# Altium PCB MainPCB.PcbDoc (part 4 of 4)
Units mm, origin at the board's own origin, x right, y up, seen from the top; angles counter-clockwise.
Board outline 219.96 x 164.97 mm, 2 copper layers (Top Layer, Bottom Layer); 298 components, 220 nets, 976 pads, 1045 vias.
Unrouted connection lines stored in the file: 1.
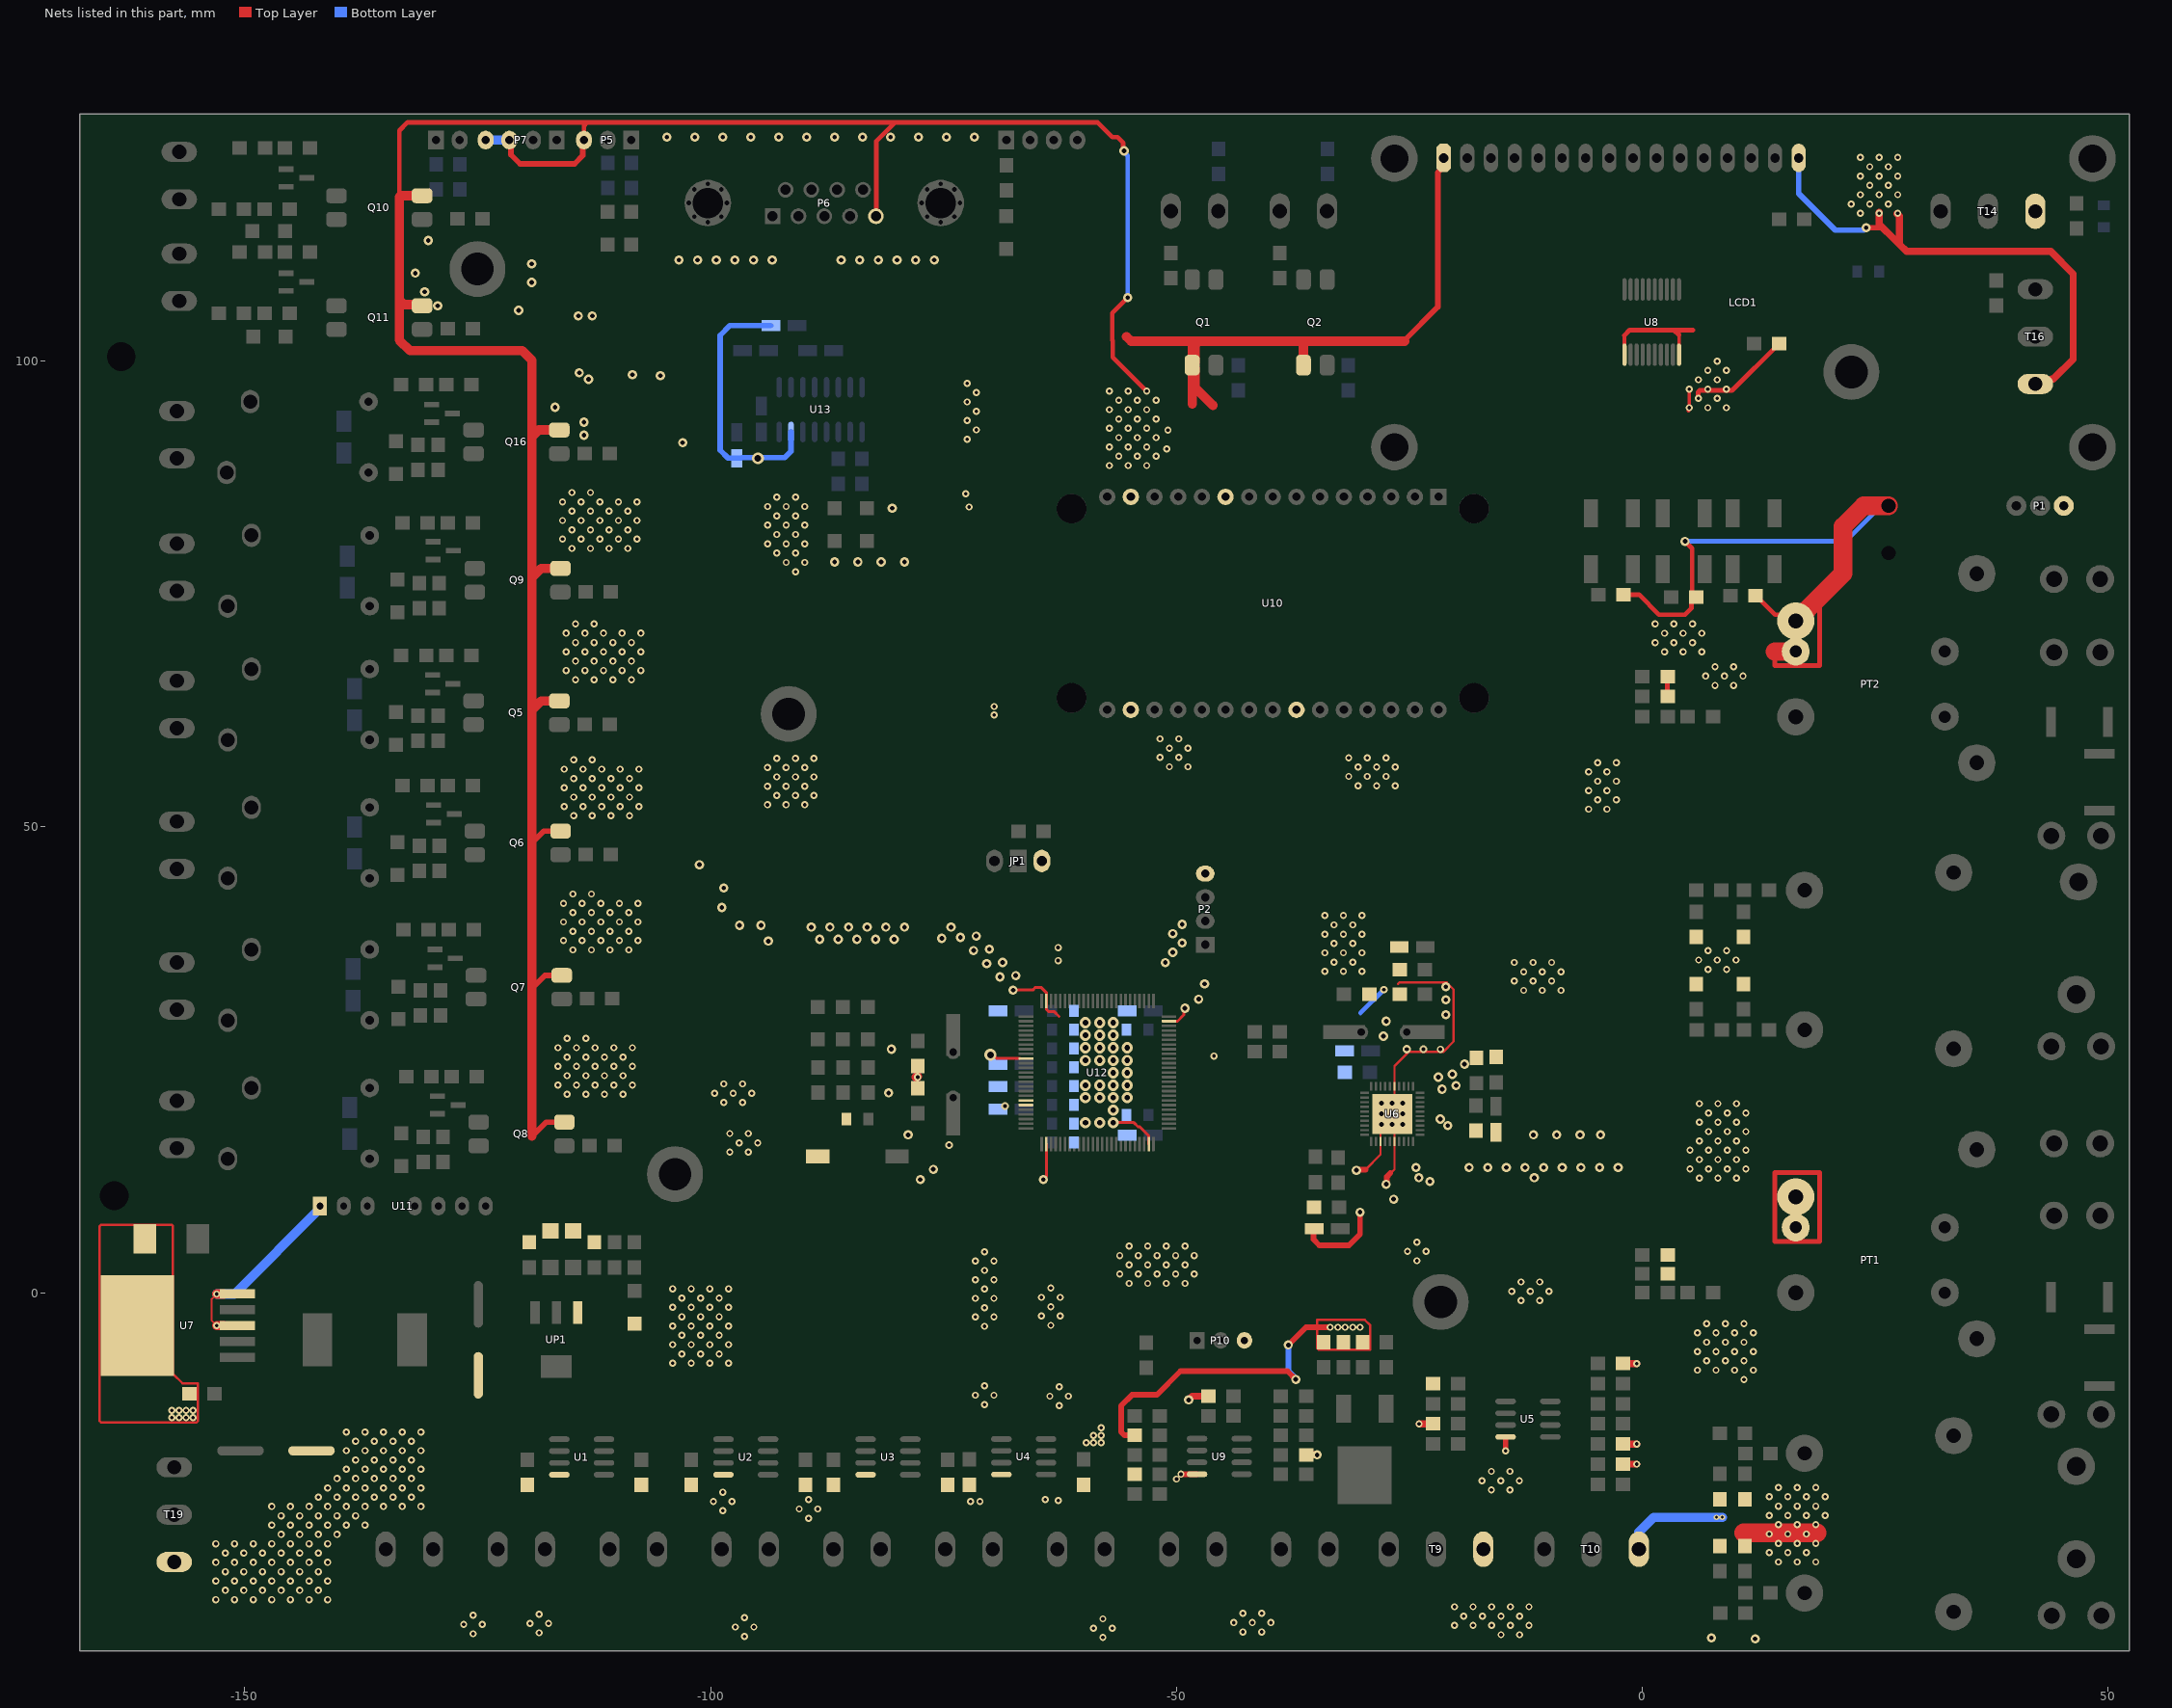
[diagram p4: the nets of this part, all layers, seen from the top]

## Via types
v1: diameter 0.762, hole 0.381, Top Layer to Bottom Layer, tented both sides, 733 vias
v2: diameter 1, hole 0.5, Top Layer to Bottom Layer, tented both sides, 230 vias
v3: diameter 1, hole 0.5, Top Layer to Bottom Layer, 35 vias
v4: diameter 1.2, hole 0.6, Top Layer to Bottom Layer, tented both sides, 28 vias
v5: diameter 0.8, hole 0.4, Top Layer to Bottom Layer, tented both sides, 10 vias
v6: diameter 1.27, hole 0.711, Top Layer to Bottom Layer, tented both sides, 4 vias
v7: diameter 0.6, hole 0.3, Top Layer to Bottom Layer, tented both sides, 3 vias
v8: diameter 1.27, hole 0.711, Top Layer to Bottom Layer, 1 vias
v9: diameter 0.9, hole 0.45, Top Layer to Bottom Layer, tented both sides, 1 vias

## Nets (pads, with @x,y where several pads share a name; then routed paths per layer and width w, separated by ;. In a path a pad name is that pad's centre, name@x,y a point inside that pad or via, vN(x,y) a via of type N, cw(c..) or ccw(c..) an arc to the next point about the centre after c; other vN are vias at no path point) (continued)
VREF-: C1.1 C2.1 C3.1 C4.1 C5.1 C6.1 C7.1 C8.2 C9.2 C10.1 C12.1 C13.1 C14.1 C15.2 C16.2 C17.1 C18.1 C19.1 C20.1 C21.1 C22.2 C23.1 C24.1 C25.2 C26.1 C28.1 C29.1 C30.1 C31.1 C36.1 C37.1 C38.1 C39.1 C40.1 C41.2 C42.1 C43.1 C44.1 C45.1 C46.1 C47.2 C48.2 C50.2 C51.1 C52.2 C53.2 C54.2 C55.2 C56.2 D1.2 D2.1 JP1.1 LCD1.1@-21.336,121.793 LCD1.16 P1.3 P2.4 P5.3 P6.5 P7.3 P7.4 P10.3 pad.10@16.449,10.287 pad.10@16.449,72.104 PT1.1 PT2.1 Q1.3 Q2.3 Q5.2 Q6.2 Q7.2 Q8.2 Q9.2 Q10.2 Q11.2 Q16.2 R1.1 R2.1 R3.1 R4.1 R5.1 R6.1 R7.1 R8.1 R13.1 R14.1 R24.2 R26.1 R27.1 R34.2 R35.1 R36.1 R40.2 R41.1 R42.1 R83.1 R98.1 R106.1 R111.1 R113.1 R114.1 R115.1 R117.2 SW1.0 T9.3 T10.3 T14.1 T16.1 T18.1 T19.3 U1.4 U2.4 U3.4 U4.4 U5.4 U6.3 U6.6 U6.25 U6.41 U7.3 U7.5 U7.6 U8.1 U8.10 U9.4 U10.10 U10.14 U10.17 U10.24 U11.1 U12.10 U12.19 U12.20 U12.27 U12.49 U12.74 U12.99 U13.15 UP1.1 | length 825.7
  Top Layer w0.2: v1@-153.035,-0.127 -153.035,-0.175 -153.543,-0.683 -153.543,-3.003 v1(-153.003,-3.543)
  Top Layer w0.25: -29.733,13.204 -28.11,14.827 U6.3@-28.11,16.218 -28.11,17.942 v2(-28.002,18.05) v2(-26.86,19.192) ; -27.14,12.697 -26.61,13.227 U6.6@-26.61,16.218 -26.61,18.942 v2(-26.86,19.192) ; -26.225,33.162 -26.098,33.289 -21.018,33.289 -20.256,32.527 -20.256,26.981 -21.403,25.834 -25.103,25.834 -26.61,24.327 U6.25@-26.61,22.166 -26.61,19.442 v2(-26.86,19.192)
  Top Layer w0.254: U7.6@-161.544,-3.543 U7.6@-157.731,0.27 ; D2.1@-160.735,5.761 D2.1@-160.735,7.285 ; U7.6@-158.718,-7.701 U7.6@-157.702,-8.717 ; R113.1@-30.003,-5.316 -30.003,-6.116 ; D2.1@-160.735,7.285 -157.851,7.285 -157.702,7.136 U7.6@-157.702,-8.717 ; D2.1@-160.735,7.285 -165.427,7.285 -165.576,7.136 -165.576,-13.775 -165.427,-13.924 -155.184,-13.924 -155.035,-13.775 -155.035,-9.733 -156.686,-9.733 U7.6@-157.702,-8.717 ; -30.003,-6.116 -29.203,-6.116 -29.203,-3.516 -29.803,-2.916 -34.903,-2.916 -34.903,-5.967 -34.754,-6.116 -30.003,-6.116
  Top Layer w0.3: v8(-69.977,25.527) -69.715,25.527 -69.325,25.137 U12.10@-66.793,25.137 ; v2(-67.546,32.477) -65.44,32.477 -65.151,32.766 ; -65.203,32.734 -64.506,32.734 -63.983,32.211 U12.99@-63.983,31.317 -63.983,30.423 -63.744,30.184 -63.153,30.184 -62.603,29.634 ; v2(-64.303,12.134) -63.983,12.454 U12.27@-63.983,15.957 ; v4@-56.896,18.288 -56.858,18.25 -54.582,18.25 -54.147,17.815 -53.947,17.815 -52.983,16.851 U12.49@-52.983,15.957 ; U12.74@-50.803,29.137 -50.793,29.147 -49.899,29.147 -49.237,29.809 -49.237,30.392 v2@-49.149,30.48 ; C24.1@-29.32,32.019 C24.1@-29.27,32.019
  Top Layer w0.381: U8.1@-1.928,100.684 -1.928,102.759 ; U8.10@3.922,100.684 3.922,102.784 3.922,103.309 ; v1@4.941,94.68 4.941,94.857 v1@5.08,94.996 ; v1@5.014,95.156 v1@5.014,96.792
  Top Layer w0.5: -133.413,117.617 -133.413,124.729 -132.524,125.618 -113.22,125.618 ; P5.3@-113.727,123.587 P5.3@-113.601,123.713 -113.601,125.237 -113.22,125.618 ; P6.5@-82.268,115.539 -82.232,115.575 -82.232,123.586 -80.2,125.618 ; v3(-55.626,122.555) -55.722,122.651 -55.722,123.404 -56.348,124.031 -56.896,124.031 -58.483,125.618 -80.2,125.618 ; v3@-55.118,106.807 v3(-55.245,106.807) -56.896,105.156 -56.896,102.227 -56.853,102.184 -56.853,100.414 v1@-53.213,96.774 ; R98.1@-2.032,74.93 -0.381,74.93 1.778,72.771 4.572,72.771 5.27,73.469 5.27,74.201 5.745,74.676 R27.1@5.842,74.676 ; C19.1@2.667,66.167 2.667,64.009 R41.1@2.7,63.976 ; v3(4.572,80.645) 5.334,79.883 5.334,75.137 R27.1@5.795,74.676 ; v1@5.969,96.012 5.969,96.671 6.147,96.849 9.63,96.849 14.635,101.854 R24.2@14.685,101.854 ; R26.1@12.145,74.803 12.195,74.803 14.224,72.774 15.618,72.774 pad.10@16.383,72.009 ; -113.22,125.618 -80.2,125.618
  Top Layer w0.508: -1.928,102.759 -1.378,103.309 3.397,103.309 ; 3.922,102.784 3.397,103.309 ; 5.397,103.309 3.922,103.309 3.397,103.309 ; 14.197,68.817 14.197,67.301 16.449,67.301 ; PT1.1@16.449,7 16.449,5.484 ; PT2.1@16.449,68.817 16.449,67.301 ; 18.997,74.701 18.997,74.652 18.997,67.301 16.449,67.301 ; 16.449,5.484 14.197,5.484 14.197,12.884 18.997,12.884 18.997,5.484 16.449,5.484
  Top Layer w0.6: P7.3@-121.602,123.713 -121.43,123.541 -121.43,122.144 -120.459,121.173 -114.617,121.173 -113.727,122.063 P5.3@-113.727,123.587 ; -119.189,16.779 -117.665,18.303 Q8.2@-115.704,18.303 ; -119.189,32.654 -117.792,34.051 Q7.2@-115.986,34.051 ; -119.189,48.275 -117.919,49.545 Q6.2@-116.113,49.545 ; v2@-37.973,-5.588 -37.973,-5.586 -36.103,-3.716 v1(-33.503,-3.716) ; C22.2@-35.306,6.858 -35.306,5.715 -34.671,5.08 -31.496,5.08 -30.303,6.273 v2(-30.303,8.634) ; v2(-30.703,13.134) -30.629,13.208 -29.718,13.208 ; v2(-27.503,11.634) -27.426,11.711 -27.426,12.452 -27.051,12.827 ; -25.527,102.235 -21.971,105.791 -21.971,120.218 -21.209,120.98 LCD1.1@-21.209,121.793 ; v3(24.003,114.3) 25.654,114.3 26.162,113.792
  Top Layer w0.61: R106.1@-54.503,-15.316 -55.587,-15.316 -55.944,-14.959 -55.944,-12.134 -54.782,-10.972 -52.118,-10.972 -49.575,-8.429 -38.09,-8.429 v2(-37.203,-9.316) v2@-37.309,-9.316 ; v1(-49.533,-19.486) U9.4@-47.803,-19.486 ; v1(-14.687,-16.972) U5.4@-14.687,-15.481
  Top Layer w0.762: v2(-48.703,-11.516) -48.303,-11.116 C31.1@-46.603,-11.116 ; C30.1@-36.103,-17.416 v2(-34.908,-17.416) ; v1(-23.971,-14.084) R13.1@-22.48,-14.084 ; R14.1@-2.094,-18.402 v1(-0.603,-18.402) ; R117.2@-2.094,-16.243 v1(-0.603,-16.243) ; C2.1@-2.094,-7.607 v1(-0.603,-7.607) ; v1@25.4,115.951 v1(25.4,115.856) 25.4,114.693 27.565,112.528 ; v1@27.305,115.824 27.565,115.564 27.565,112.528 ; T16.1@42.164,97.536 43.368,97.536 43.891,98.06 44.085,98.06 46.228,100.203 46.228,109.347 43.815,111.76 28.333,111.76 27.565,112.528
  Top Layer w1: v1(-153.003,-3.543) U7.3@-152.224,-3.543 ; v1(-153.003,-0.143) U7.5@-152.224,-0.143 ; Q11.2@-130.972,105.933 -131.099,106.06 -132.905,106.06 -133.413,106.568 ; Q10.2@-130.972,117.744 -133.286,117.744 -133.413,117.617 -133.413,106.568 ; -119.189,16.779 -119.189,32.654 -119.189,33.67 -119.189,48.275 -119.189,50.561 -119.189,62.499 ; Q16.2@-116.247,92.598 -118.427,92.598 -119.189,91.836 ; Q5.2@-116.24,63.515 -118.173,63.515 -119.189,62.499 ; Q9.2@-116.12,77.739 -118.173,77.739 -119.189,76.723 ; v5@-77.922,23.129 -77.858,23.193 v5@-77.787,23.193 ; -55.372,102.616 -54.879,102.123 -48.303,102.123 ; -48.303,95.384 -48.323,95.384 -48.323,97.47 ; -46.103,95.25 -48.023,97.17 ; Q2.3@-36.385,99.555 -36.385,102.123 ; -25.527,102.123 -36.385,102.123 ; -133.413,106.568 -133.413,102.25 -132.27,101.107 -120.205,101.107 -119.189,100.091 -119.189,91.836 ; -119.189,62.499 -119.189,76.723 ; -119.189,76.723 -119.189,91.836 ; -48.323,97.47 -48.023,97.17 ; -48.323,97.47 Q1.3@-48.323,99.555 -48.023,99.255 -48.023,97.17 ; -48.303,102.123 -47.603,102.123 ; -48.303,102.123 -48.303,99.575 -48.023,99.855 -48.023,101.703 -47.603,102.123 ; -47.603,102.123 -36.385,102.123
  Top Layer w2: 10.859,-25.766 18.733,-25.766 ; 14.197,68.817 PT2.1@16.449,68.817 ; pad.10@16.637,72.292 18.997,74.652 21.528,77.183 21.528,82.234 23.749,84.455 T18.1@26.416,84.455
  Bottom Layer w0.5: v3(-55.626,122.555) -55.626,122.42 -55.245,122.039 v3(-55.245,106.807) ; -30.258,30.018 v5(-27.749,32.527) ; v3(4.572,80.645) 21.78,80.645 25.59,84.455 T18.1@26.289,84.455
  Bottom Layer w0.6: C50.2@-96.71,89.578 -98.135,89.578 -98.996,90.439 -98.996,102.758 -97.952,103.802 C51.1@-93.541,103.802 ; C50.2@-96.664,89.63 -92.058,89.63 -91.376,90.312 U13.15@-91.376,92.385 ; LCD1.16@16.764,121.793 16.764,117.983 20.701,114.046 23.749,114.046 v3(24.003,114.3)
  Bottom Layer w0.61: v2(-38.003,-5.616) -38.003,-8.41 -37.203,-9.21 v2(-37.203,-9.316)
  Bottom Layer w1: v1(-153.003,-0.143) -151.101,-0.143 -141.859,9.099 U11.1@-141.859,9.144 ; P7.4@-124.142,123.713 P7.3@-121.602,123.713 ; T10.3@-0.38,-27.544 -0.38,-25.702 1.207,-24.115 v7(7.938,-24.115) v7(8.573,-24.115)
  other v1: -57.903,-37.016 -96.36,-36.895 -15.186,-36.72 -13.186,-36.72 -125.503,-36.616 -118.403,-36.516 -42.878,-36.42 -40.878,-36.42 -58.903,-36.016 -56.903,-36.016 -97.36,-35.895 -95.36,-35.895 -20.186,-35.72 -18.186,-35.72 -16.186,-35.72 -14.186,-35.72 -12.186,-35.72 -126.503,-35.616 -124.503,-35.616 -119.403,-35.516 -117.403,-35.516 -43.878,-35.42 -41.878,-35.42 -39.878,-35.42 -57.903,-35.016 -96.36,-34.895 -19.186,-34.72 -17.186,-34.72 -15.186,-34.72 -13.186,-34.72 -125.503,-34.616 -118.403,-34.516 -42.878,-34.42 -40.878,-34.42 -20.186,-33.72 -18.186,-33.72 -16.186,-33.72 -14.186,-33.72 -12.186,-33.72 -153.102,-32.953 -151.102,-32.953 -149.102,-32.953 -147.102,-32.953 -145.102,-32.953 -143.102,-32.953 -141.102,-32.953 -152.102,-31.953 -150.102,-31.953 -148.102,-31.953 -146.102,-31.953 -144.102,-31.953 -142.102,-31.953 -153.102,-30.953 -151.102,-30.953 -149.102,-30.953 -147.102,-30.953 -145.102,-30.953 -143.102,-30.953 -141.102,-30.953 -152.102,-29.953 -150.102,-29.953 -148.102,-29.953 -146.102,-29.953 -144.102,-29.953 -142.102,-29.953 -153.102,-28.953 -151.102,-28.953 -149.102,-28.953 -147.102,-28.953 -145.102,-28.953 -143.102,-28.953 -141.102,-28.953 14.597,-28.916 16.597,-28.916 18.597,-28.916 -152.102,-27.953 -150.102,-27.953 -148.102,-27.953 -146.102,-27.953 -144.102,-27.953 -142.102,-27.953 13.597,-27.916 15.597,-27.916 17.597,-27.916 -153.102,-26.953 -151.102,-26.953 -149.102,-26.953 -147.102,-26.953 -145.102,-26.953 -143.102,-26.953 -141.102,-26.953 14.597,-26.916 16.597,-26.916 18.597,-26.916 -146.102,-25.953 -144.102,-25.953 -142.102,-25.953 -140.102,-25.953 13.597,-25.916 15.597,-25.916 17.597,-25.916 -147.102,-24.953 -145.102,-24.953 -143.102,-24.953 -141.102,-24.953 -139.102,-24.953 -137.102,-24.953 14.597,-24.916 16.597,-24.916 18.597,-24.916 -89.503,-24.216 -146.102,-23.953 -144.102,-23.953 -142.102,-23.953 -140.102,-23.953 -138.102,-23.953 13.597,-23.916 15.597,-23.916 17.597,-23.916 19.597,-23.916 -98.703,-23.416 -90.503,-23.216 -88.503,-23.216 -147.102,-22.953 -145.102,-22.953 -143.102,-22.953 -141.102,-22.953 -139.102,-22.953 -137.102,-22.953 -135.102,-22.953 -133.102,-22.953 -131.102,-22.953 14.597,-22.916 16.597,-22.916 18.597,-22.916 -99.703,-22.416 -97.703,-22.416 -72.103,-22.416 -71.103,-22.416 -62.703,-22.316 -89.503,-22.216 -64.103,-22.216 -142.102,-21.953 -140.102,-21.953 -138.102,-21.953 -136.102,-21.953 -134.102,-21.953 -132.102,-21.953 13.597,-21.916 15.597,-21.916 17.597,-21.916 19.597,-21.916 -98.703,-21.416 -16.208,-21.18 -14.208,-21.18 -141.102,-20.953 -139.102,-20.953 -137.102,-20.953 -135.102,-20.953 -133.102,-20.953 -131.102,-20.953 14.597,-20.916 16.597,-20.916 18.597,-20.916 -17.208,-20.18 -15.208,-20.18 -13.208,-20.18 -50.003,-20.016 -140.102,-19.953 -138.102,-19.953 -136.102,-19.953 -134.102,-19.953 -132.102,-19.953 -16.208,-19.18 -14.208,-19.18 -139.102,-18.953 -137.102,-18.953 -135.102,-18.953 -133.102,-18.953 -131.102,-18.953 -138.102,-17.953 -136.102,-17.953 -134.102,-17.953 -132.102,-17.953 -139.102,-16.953 -137.102,-16.953 -135.102,-16.953 -133.102,-16.953 -131.102,-16.953 -59.703,-16.116 -58.903,-16.116 -58.103,-16.116 -138.102,-15.953 -136.102,-15.953 -134.102,-15.953 -132.102,-15.953 -58.903,-15.316 -58.103,-15.316 -139.102,-14.953 -137.102,-14.953 -135.102,-14.953 -133.102,-14.953 -131.102,-14.953 -58.103,-14.516 -157.829,-13.416 -157.067,-13.416 -156.305,-13.416 -155.543,-13.416 -157.829,-12.654 -157.067,-12.654 -156.305,-12.654 -155.543,-12.654 -62.603,-12.116 -70.603,-12.016 -63.603,-11.116 -61.603,-11.116 -71.603,-11.016 -69.603,-11.016 -62.603,-10.116 -70.603,-10.016 10.897,-9.316 5.897,-8.316 7.897,-8.316 9.897,-8.316 11.897,-8.316 -104.082,-7.586 -102.082,-7.586 -100.082,-7.586 -98.082,-7.586 6.897,-7.316 8.897,-7.316 10.897,-7.316 -103.082,-6.586 -101.082,-6.586 -99.082,-6.586 5.897,-6.316 7.897,-6.316 9.897,-6.316 11.897,-6.316 -104.082,-5.586 -102.082,-5.586 -100.082,-5.586 -98.082,-5.586 6.897,-5.316 8.897,-5.316 10.897,-5.316 -103.082,-4.586 -101.082,-4.586 -99.082,-4.586 5.897,-4.316 7.897,-4.316 9.897,-4.316 11.897,-4.316 -32.703,-3.716 -31.903,-3.716 -31.103,-3.716 -30.303,-3.716 -70.603,-3.616 -104.082,-3.586 -102.082,-3.586 -100.082,-3.586 -98.082,-3.586 -63.503,-3.516 6.897,-3.316 8.897,-3.316 10.897,-3.316 -71.603,-2.616 -69.603,-2.616 -103.082,-2.586 -101.082,-2.586 -99.082,-2.586 -64.503,-2.516 -62.503,-2.516 -70.603,-1.616 -104.082,-1.586 -102.082,-1.586 -100.082,-1.586 -98.082,-1.586 -63.503,-1.516 -13.033,-0.86 -11.033,-0.86 -71.603,-0.616 -69.603,-0.616 -103.082,-0.586 -101.082,-0.586 -99.082,-0.586 -64.503,-0.516 -62.503,-0.516 -14.033,0.14 -12.033,0.14 -10.033,0.14 -70.603,0.384 -104.082,0.414 -102.082,0.414 -100.082,0.414 -98.082,0.414 -63.503,0.484 -55.103,0.984 -53.103,0.984 -51.103,0.984 -49.103,0.984 -13.033,1.14 -11.033,1.14 -71.603,1.384 -69.603,1.384 -56.103,1.984 -54.103,1.984 -52.103,1.984 -50.103,1.984 -48.103,1.984 -70.603,2.384 -55.103,2.984 -53.103,2.984 -51.103,2.984 -49.103,2.984 -71.603,3.384 -69.603,3.384 -24.221,3.417 -56.103,3.984 -54.103,3.984 -52.103,3.984 -50.103,3.984 -48.103,3.984 -70.603,4.384 -25.221,4.417 -23.221,4.417 -55.103,4.984 -53.103,4.984 -51.103,4.984 -49.103,4.984 -24.221,5.417 6.097,12.284 8.097,12.284 10.097,12.284 5.097,13.284 7.097,13.284 9.097,13.284 11.097,13.284 6.097,14.284 8.097,14.284 10.097,14.284 -97.946,15.079 -95.946,15.079 5.097,15.284 7.097,15.284 9.097,15.284 11.097,15.284 -96.946,16.079 -94.946,16.079 6.097,16.284 8.097,16.284 10.097,16.284 -97.946,17.079 -95.946,17.079 7.097,17.284 9.097,17.284 11.097,17.284 6.097,18.284 8.097,18.284 10.097,18.284 7.097,19.284 9.097,19.284 11.097,19.284 6.097,20.284 8.097,20.284 10.097,20.284 -98.581,20.413 -96.581,20.413 -115.403,21.284 -113.403,21.284 -111.403,21.284 -109.403,21.284 -99.581,21.413 -97.581,21.413 -95.581,21.413 -116.403,22.284 -114.403,22.284 -112.403,22.284 -110.403,22.284 -108.403,22.284 -98.581,22.413 -96.581,22.413 -115.403,23.284 -113.403,23.284 -111.403,23.284 -109.403,23.284 -116.403,24.284 -114.403,24.284 -112.403,24.284 -110.403,24.284 -108.403,24.284 -115.403,25.284 -113.403,25.284 -111.403,25.284 -109.403,25.284 -45.974,25.4 -116.403,26.284 -114.403,26.284 -112.403,26.284 -110.403,26.284 -108.403,26.284 -115.403,27.284 -113.403,27.284 -12.747,32.447 -10.747,32.447 -8.747,32.447 -13.747,33.447 -11.747,33.447 -9.747,33.447 -12.747,34.447 -10.747,34.447 -8.747,34.447 -34.103,34.484 -32.103,34.484 -30.103,34.484 7.033,34.7 9.033,34.7 -13.747,35.447 -11.747,35.447 -9.747,35.447 -33.103,35.484 -31.103,35.484 6.033,35.7 8.033,35.7 10.033,35.7 -34.103,36.484 -32.103,36.484 -30.103,36.484 7.033,36.7 9.033,36.7 -114.803,36.784 -112.803,36.784 -110.803,36.784 -108.803,36.784 -33.103,37.484 -31.103,37.484 -115.803,37.784 -113.803,37.784 -111.803,37.784 -109.803,37.784 -107.803,37.784 -34.103,38.484 -32.103,38.484 -30.103,38.484 -114.803,38.784 -112.803,38.784 -110.803,38.784 -108.803,38.784 -33.103,39.484 -31.103,39.484 -115.803,39.784 -113.803,39.784 -111.803,39.784 -109.803,39.784 -107.803,39.784 -34.103,40.484 -32.103,40.484 -30.103,40.484 -114.803,40.784 -112.803,40.784 -110.803,40.784 -108.803,40.784 -115.803,41.784 -113.803,41.784 -111.803,41.784 -109.803,41.784 -107.803,41.784 -114.803,42.784 -112.803,42.784 -114.703,51.184 -112.703,51.184 -110.703,51.184 -108.703,51.184 -5.773,51.897 -3.808,51.897 -115.703,52.184 -113.703,52.184 -111.703,52.184 -109.703,52.184 -107.703,52.184 -93.907,52.367 -91.907,52.367 -89.907,52.367 -4.808,52.897 -2.808,52.897 -114.703,53.184 -112.703,53.184 -110.703,53.184 -108.703,53.184 -92.907,53.367 -90.907,53.367 -88.907,53.367 -5.773,53.897 -3.808,53.897 -115.703,54.184 -113.703,54.184 -111.703,54.184 -109.703,54.184 -107.703,54.184 -93.907,54.367 -91.907,54.367 -89.907,54.367 -30.527,54.418 -28.527,54.418 -26.527,54.418 -4.808,54.897 -2.808,54.897 -114.703,55.184 -112.703,55.184 -110.703,55.184 -108.703,55.184 -92.907,55.367 -90.907,55.367 -88.907,55.367 -31.527,55.418 -29.527,55.418 -27.527,55.418 -5.773,55.897 -3.808,55.897 -115.703,56.184 -113.703,56.184 -111.703,56.184 -109.703,56.184 -107.703,56.184 -93.907,56.367 -91.907,56.367 -89.907,56.367 -30.527,56.418 -28.527,56.418 -26.527,56.418 -50.774,56.446 -48.774,56.446 -4.808,56.897 -2.808,56.897 -114.703,57.184 -112.703,57.184 -92.907,57.367 -90.907,57.367 -88.907,57.367 -31.527,57.418 -29.527,57.418 -27.527,57.418 -51.774,57.446 -49.774,57.446 -50.774,58.446 -48.774,58.446 -51.774,59.446 -49.774,59.446 -69.564,62.022 -69.564,62.911 7.795,65.18 9.795,65.18 -114.503,65.784 -112.503,65.784 -110.503,65.784 -108.503,65.784 6.795,66.18 8.795,66.18 10.795,66.18 -115.503,66.784 -113.503,66.784 -111.503,66.784 -109.503,66.784 -107.503,66.784 7.795,67.18 9.795,67.18 -114.503,67.784 -112.503,67.784 -110.503,67.784 -108.503,67.784 -115.503,68.784 -113.503,68.784 -111.503,68.784 -109.503,68.784 -107.503,68.784 2.366,68.769 4.366,68.769 6.366,68.769 1.366,69.769 3.366,69.769 5.366,69.769 -114.503,69.784 -112.503,69.784 -110.503,69.784 -108.503,69.784 -115.503,70.784 -113.503,70.784 -111.503,70.784 -109.503,70.784 -107.503,70.784 2.366,70.769 4.366,70.769 6.366,70.769 1.366,71.769 3.366,71.769 5.366,71.769 -114.503,71.784 -112.503,71.784 -90.903,77.384 -91.903,78.384 -89.903,78.384 -92.903,79.384 -90.903,79.384 -114.903,79.884 -112.903,79.884 -110.903,79.884 -108.903,79.884 -93.903,80.384 -91.903,80.384 -89.903,80.384 -115.903,80.884 -113.903,80.884 -111.903,80.884 -109.903,80.884 -107.903,80.884 -92.903,81.384 -90.903,81.384 -114.903,81.884 -112.903,81.884 -110.903,81.884 -108.903,81.884 -93.903,82.384 -91.903,82.384 -89.903,82.384 -115.903,82.884 -113.903,82.884 -111.903,82.884 -109.903,82.884 -107.903,82.884 -92.903,83.384 -90.903,83.384 -114.903,83.884 -112.903,83.884 -110.903,83.884 -108.903,83.884 -72.263,84.328 -93.903,84.384 -91.903,84.384 -89.903,84.384 -115.903,84.884 -113.903,84.884 -111.903,84.884 -109.903,84.884 -107.903,84.884 -92.903,85.384 -90.903,85.384 -72.612,85.739 -114.903,85.884 -112.903,85.884 -57.203,88.784 -55.203,88.784 -53.203,88.784 -56.203,89.784 -54.203,89.784 -52.203,89.784 -51.054,90.551 -57.203,90.784 -55.203,90.784 -53.203,90.784 -72.485,91.613 -56.203,91.784 -54.203,91.784 -52.203,91.784 -50.927,92.583 -71.485,92.613 -57.203,92.784 -55.203,92.784 -53.203,92.784 -72.485,93.613 -56.203,93.784 -54.203,93.784 -52.203,93.784 -71.485,94.613 -57.203,94.784 -55.203,94.784 -53.203,94.784 5.014,94.98 7.014,94.98 9.014,94.98 -72.485,95.613 -56.203,95.784 -54.203,95.784 -52.203,95.784 6.014,95.98 8.014,95.98 -71.485,96.613 -57.203,96.784 -55.203,96.784 -53.203,96.784 5.014,96.98 7.014,96.98 9.014,96.98 -72.485,97.613 6.014,97.98 8.014,97.98 7.014,98.98 9.014,98.98 8.014,99.98 23.4,115.856 27.4,115.856 22.4,116.856 24.4,116.856 26.4,116.856 23.4,117.856 25.4,117.856 27.4,117.856 24.4,118.856 26.4,118.856 23.4,119.856 25.4,119.856 27.4,119.856 24.4,120.856 26.4,120.856 23.4,121.856 25.4,121.856 27.4,121.856
  other v2: 12.097,-37.166 7.397,-37.066 -26.703,10.034 -22.803,11.934 -77.503,12.134 -24.003,12.334 -11.603,12.334 -76.103,13.234 -24.303,13.434 -18.603,13.434 -16.603,13.434 -14.603,13.434 -12.603,13.434 -10.603,13.434 -8.603,13.434 -6.603,13.434 -4.603,13.434 -2.603,13.434 -78.803,16.934 -11.703,16.934 -9.203,16.934 -6.703,16.934 -4.503,16.934 -20.903,17.934 -26.86,18.05 -25.718,18.05 -21.703,18.634 -28.002,19.192 -25.718,19.192 -28.002,20.334 -26.86,20.334 -25.718,20.334 -80.903,21.434 -21.503,21.834 -20.003,22.234 -21.907,23.129 -20.403,23.434 -19.103,24.534 -80.603,26.134 -27.803,27.534 -27.503,29.134 -21.103,29.834 -49.103,30.534 -21.103,31.434 -47.625,31.496 -21.103,32.834 -46.99,33.147 -68.96,33.891 -67.263,34.033 -70.375,35.306 -51.203,35.434 -68.678,35.447 -50.403,36.534 -71.789,36.72 -70.092,36.861 -49.403,37.534 -93.803,37.734 -88.303,37.934 -86.303,37.934 -84.303,37.934 -82.303,37.934 -80.303,37.934 -75.203,38.034 -73.203,38.134 -71.506,38.275 -50.403,38.534 -89.203,39.234 -87.203,39.234 -85.203,39.234 -83.203,39.234 -81.203,39.234 -79.203,39.234 -74.203,39.234 -96.903,39.434 -94.603,39.434 -49.403,39.534 -98.803,41.334 -98.603,43.434 -101.203,45.934 -86.703,78.434 -84.203,78.434 -81.703,78.434 -79.203,78.434 -80.518,84.201 -103.003,91.234 -113.603,92.034 -113.603,93.434 -116.703,95.034 -113.103,98.034 -105.403,98.434 -108.403,98.534 -114.103,98.734 -114.203,104.834 -112.703,104.834 -120.603,105.434 -129.303,105.934 -130.703,107.434 -119.203,108.434 -131.703,109.434 -119.203,110.434 -103.403,110.834 -101.403,110.834 -99.403,110.834 -97.403,110.834 -95.403,110.834 -93.403,110.834 -86.003,110.834 -84.003,110.834 -82.003,110.834 -80.003,110.834 -78.003,110.834 -76.003,110.834 -130.303,112.934 -104.703,124.034 -101.703,124.034 -98.703,124.034 -95.703,124.034 -92.703,124.034 -89.703,124.034 -86.703,124.034 -83.703,124.034 -80.703,124.034 -77.703,124.034 -74.703,124.034 -71.703,124.034
  other v4: -59.787,18.25 -58.245,18.25 -56.803,18.25 -56.803,19.592 -59.787,20.934 -58.245,20.934 -56.803,20.934 -55.303,20.934 -59.787,22.25 -58.245,22.25 -56.803,22.25 -55.303,22.25 -56.803,23.592 -55.303,23.592 -59.787,24.934 -58.245,24.934 -56.803,24.934 -55.303,24.934 -59.787,26.292 -58.245,26.292 -56.803,26.292 -55.303,26.292 -59.787,27.634 -58.245,27.634 -56.803,27.634 -59.787,28.976 -58.245,28.976 -56.803,28.976
  other v5: -74.403,15.834 -68.403,20.034 -77.787,23.129 -23.503,26.134 -21.686,26.117 -62.703,35.634 -62.703,37.034
  other v6: -94.932,89.55
  other v9: -25.303,26.134
pads on no net: CT1.0 CT2.0 LCD1.1@48.302,90.762 LCD1.1@48.302,121.75 LCD1.1@-26.628,90.762 LCD1.1@-26.628,121.75 LCD1.7 LCD1.8 LCD1.9 LCD1.10 P6.1 P6.4 P6.6 P6.7 P6.8 P6.9 P6.10 P6.11 U6.1 U6.10 U6.11 U6.13 U6.14 U6.15 U6.16 U6.19 U6.20 U6.21 U6.30 U6.31 U6.33 U6.34 U6.35 U6.40 U8.2 U8.4 U8.19 U10. U10.1 U10.2 U10.3 U10.4 U10.5 U10.6 U10.7 U10.8 U10.9 U10.11 U10.12 U10.13 U10.16 U10.18 U10.19 U10.25 U10.26 U10.27 U10.28 U10.29 U10.30 U11.3 U11.5 U11.8 U12.9 U12.29 U12.37 U12.38 U12.39 U12.41 U12.43 U12.46 U12.48 U12.61 U12.62 U12.65 U12.66 U12.73 U12.83 U12.84 U12.85 U12.88 U12.91 U12.97 U13.7 U13.10 U13.12 U13.13

## Polygon pours and split planes (outlines as drawn)
VREF- on Bottom Layer (solid, remove dead copper, pour order 1): -140.97,126.111 -141.351,125.73 -141.351,101.092 -119.888,101.092 -117.729,98.933 -117.729,9.525 -120.65,6.604 -162.052,6.604 -167.005,1.651 -167.005,-37.592 21.844,-37.592 21.844,71.12 32.512,81.788 51.181,81.788 51.181,124.206 49.022,126.365 -141.224,126.365 -141.351,126.238 -141.224,126.238
VREF- on Top Layer (solid, remove dead copper, pour order 0): -140.97,126.111 -141.351,125.73 -141.351,101.092 -119.888,101.092 -117.729,98.933 -117.729,9.525 -120.65,6.604 -162.052,6.604 -167.005,1.651 -167.005,-37.592 21.844,-37.592 21.844,71.12 32.512,81.788 51.181,81.788 51.181,124.206 49.022,126.365 -141.224,126.365 -141.351,126.238 -141.224,126.238

## Keep-outs
Keep-Out Layer:
  lines w0.2: -167.703,126.507 -167.703,-38.466 52.297,-38.466 52.297,126.534 -167.703,126.534
  lines w0.254: -159.702,10.175 -147.383,10.175 -144.97,12.588 -144.97,97.17 -147.637,99.837 -159.194,99.837 -159.194,98.567 -148.145,98.567 -146.113,96.535 -146.113,13.35 -148.145,11.318 -159.702,11.318 -159.702,10.175 ; -135.953,100.599 -134.683,99.329 -122.872,99.329 -121.602,98.059 -121.602,10.46 -120.84,10.46 -120.84,67.574 -120.84,98.313 -122.491,99.964 -134.302,99.964 -135.266,100.928 -135.266,120.411 -135.953,120.411 -135.953,100.599 ; -51.054,103.242 -51.054,104.893 -30.988,104.893 -30.988,103.242 -51.054,103.242
  lines w2: 24.765,73.279 25.228,-8.686

## Other copper
Top Layer:
  rectangle net 3.3v-ADE: -35.623,13.731 -32.067,15.255
  rectangle net 3.3v-ADE: -68.77,110.378 -67.754,112.04
  rectangle net 3.3v-ADE: -111.823,111.775 -107.759,113.242
  rectangle net 5-volt: -64.963,-15.643 -62.963,-14.543
  rectangle net 5-volt: -79.537,-15.666 -77.537,-14.566
  rectangle net 5-volt: -94.794,-15.666 -92.794,-14.566
  rectangle net VREF-: 14.197,67.301 18.997,74.701
  rectangle net VREF-: 3.922,95.584 6.397,103.484
  rectangle net VREF-: 5.271,32.527 11.494,38.877
  region net VREF-: -21.403,25.834 -20.201,27.036 -20.484,27.319 -21.686,26.117
  rectangle net VREF-: -57.103,95.484 -48.103,102.184
  rectangle net VREF-: 14.197,5.484 18.997,12.884
  rectangle net VREF-: 7.684,-27.925 11.621,-21.448
  rectangle net VREF-: -36.004,6.365 -34.48,9.794
  rectangle net VREF-: -68.603,20.137 -63.603,20.675
  rectangle net VREF-: -78.422,21.351 -77.152,25.034
  rectangle net Pulse2: -34.48,98.821 -32.321,100.345
  rectangle net NetR33_1: 47.403,-4.686 51.594,1.283
  rectangle net NetR85_1: 47.403,57.069 51.594,63.038
  rectangle net PH2: 42.244,41.798 50.864,50.831
  rectangle net REF: -18.01,19.467 -15.51,20.467
  rectangle net VIN: -18.003,22.034 -15.503,23.034
  rectangle net DVDD: -33.337,6.746 -31.813,9.794
  rectangle net RESET: -35.496,11.064 -32.067,12.461
  rectangle net AVDD: -24.066,34.051 -22.669,37.48
  rectangle net CLKOUT: -32.829,27.574 -31.305,32.654
  rectangle net CLKIN: -24.193,27.701 -22.796,32.654
  rectangle net NetCT2_1: 12.891,42.56 18.606,43.83
  rectangle net IBN: 5.144,40.274 6.414,43.83
  rectangle net NetCT2_2: 12.891,27.574 17.717,28.844
  rectangle net IBP: 5.017,27.828 6.541,31.003
  rectangle net NetCT1_2: 13.145,-33.005 17.971,-31.608
  rectangle net IAP: 7.684,-35.037 9.081,-29.195
  rectangle net NetFr1_2: 10.351,-35.164 11.748,-29.195
  rectangle net IAN: 7.557,-20.051 9.081,-14.336
  rectangle net NetCT1_1: 13.018,-18.019 17.844,-16.495
  rectangle net NetFr3_2: 10.224,-20.305 11.748,-14.463
  rectangle net PH1: 42.244,-20.813 50.991,-11.399
  rectangle net NetCT2_3: 42.244,-36.45 50.864,-26.401
  rectangle net NetCT1_3: 42.244,24.796 50.991,34.559
  rectangle net out7: -140.906,113.299 -139.382,115.966
  rectangle net out8: -140.906,101.615 -139.382,104.155
  rectangle net NetC48_1: -78.549,18.43 -73.469,19.954
  rectangle net NetC47_1: -78.422,26.304 -73.596,27.701
  rectangle net NetD17_2: -111.823,115.204 -110.299,117.744
  rectangle net NetD18_2: -109.283,115.204 -107.759,117.744
  rectangle net NetD20_2: -87.439,83.454 -85.915,86.121
  rectangle net NetD19_2: -84.01,83.454 -82.486,86.121
  rectangle net GND-out: -140.271,105.171 -137.477,106.695
  rectangle net NetD16_2: -68.897,115.204 -67.627,119.014
  rectangle net CS-FREE: -69.024,120.284 -67.5,124.475
  rectangle net Pulse1: -46.418,98.821 -44.259,100.345
  rectangle net NetR19_1: -51.244,110.886 -49.974,115.585
  region net 5-volt: -3.803,106.107 -3.803,107.36 -2.491,108.672 -2.459,108.64 -1.928,108.64 -1.928,105.884 -3.58,105.884
  region net 5-volt: -134.969,-7.764 -132.619,-7.764 -129.127,-4.272 -118.354,-4.272 -118.205,-4.123 -118.205,-0.208 -116.3,1.697 -116.3,3.326 -116.449,3.475 -120.491,3.475 -122.396,1.57 -134.969,1.57
  region net 5-volt: -123.666,1.57 -121.761,3.475 -120.491,3.475 -120.491,2.459 -121.761,1.189
  region net VREF-: 5.397,103.309 6.597,104.509 6.597,103.409 6.697,103.309
  region net VREF-: -30.035,32.781 -29.273,32.781 -27.114,34.94 -27.114,37.607 -25.336,37.607 -25.336,31.384 -30.035,31.384
  region net VREF-: -48.203,97.184 -46.703,95.684 -46.703,95.584 -48.003,95.584 -48.103,95.484
  region net VREF-: -34.903,-2.916 -34.903,-5.967 -34.754,-6.116 -29.203,-6.116 -29.203,-3.516 -29.803,-2.916
  region net VREF-: -165.576,-13.775 -165.576,7.285 -157.851,7.285 -157.702,7.136 -157.702,-8.717 -156.686,-9.733 -155.035,-9.733 -155.035,-13.775 -155.184,-13.924
  region net PH2: 42.244,50.604 42.244,50.994 cw(c44.784,50.994) 44.784,53.534 48.34,53.534 cw(c48.34,50.994) 50.88,50.994 50.88,50.604
  region net NULL2: 51.005,79.088 ccw(c49.354,79.088) 49.354,80.739 44.02,80.739 ccw(c44.02,79.088) 42.369,79.088 42.369,74.04 cw(c40.702,74.04) 40.702,72.373 33.336,72.373 ccw(c33.336,69.833) 30.796,69.833 30.796,69.071 ccw(c32.574,69.071) 32.574,67.293 48.465,67.293 ccw(c48.465,69.833) 51.005,69.833
  region net PH1: 42.244,-11.372 42.244,-10.982 cw(c44.784,-10.982) 44.784,-8.442 48.34,-8.442 cw(c48.34,-10.982) 50.88,-10.982 50.88,-11.372
  region net NULL1: 51.005,17.271 ccw(c49.354,17.271) 49.354,18.922 44.02,18.922 ccw(c44.02,17.271) 42.369,17.271 42.369,12.223 cw(c40.702,12.223) 40.702,10.556 33.336,10.556 ccw(c33.336,8.016) 30.796,8.016 30.796,7.254 ccw(c32.574,7.254) 32.574,5.476 48.465,5.476 ccw(c48.465,8.016) 51.005,8.016
  region net NetD2_2: -153.384,2.713 -154.786,1.311 -154.786,-4.521 -154.492,-4.815 -148.687,-4.815 -145.477,-1.605 -140.547,-1.605 -140.43,-1.722 -140.43,-8.219 -140.547,-8.336 -145.797,-8.336 -148.418,-5.715 -156.569,-5.715 -156.686,-5.598 -156.686,7.793 -153.384,7.793
  region net NetPT1_4: 30.893,1.537 44.609,1.537 44.609,-2.273 42.196,-2.273 37.624,-6.845 31.042,-6.845 30.893,-6.696
  region net NetPT2_4: 30.893,63.292 44.609,63.292 44.609,59.482 42.196,59.482 37.624,54.91 31.042,54.91 30.893,55.059
  region net NULL2: 33.336,79.401 37.999,79.401 38.297,79.103 38.297,73.201 39.697,71.801 39.597,71.701 33.436,71.701
  region net 12-volt: -159.734,-20.02 -159.734,-17.353 -156.051,-17.353 -154.146,-15.448 -154.146,-6.542 -150.356,-6.542 -148.812,-6.691 -148.812,-15.575 -148.05,-16.337 -148.05,-19.871 -148.199,-20.02
  pour cut-out: -51.003,-11.916 -51.003,-9.716 -44.903,-9.716 -44.903,-10.416 -50.428,-10.416 -50.428,-11.891
  region net NetQ19_2: -35.103,-29.516 -35.103,-22.316 -33.003,-20.216 -33.003,-16.433 -32.886,-16.316 -26.503,-16.316 -26.503,-23.416 -27.603,-23.416 -30.603,-26.416 -30.603,-29.399 -30.72,-29.516
  region net NetQ19_3: -35.003,-7.216 -29.452,-7.216 -29.303,-7.365 -29.303,-9.016 -31.203,-10.916 -31.203,-14.116 -32.954,-14.116 -33.103,-13.967 -33.103,-10.505 -35.003,-8.605
  region net NULL1: 33.497,17.584 37.999,17.584 38.297,17.286 38.297,11.384 39.697,9.984 39.597,9.884 33.597,9.884
  region net NetFr4_2: 11.494,31.13 11.494,27.447 8.065,27.447 8.065,29.341 9.854,31.13
  region net NetFr6_2: 11.621,43.83 11.621,40.147 9.462,40.147 7.811,41.798 7.811,43.83
  region net NO4: -158.051,16.525 -151.701,16.525 -150.812,15.636 -150.812,13.096 -152.717,13.096 -154.114,14.493 -158.051,14.493
  region net NO3: -158.051,31.384 -151.701,31.384 -150.812,30.495 -150.812,27.955 -152.717,27.955 -154.114,29.352 -158.051,29.352
  region net NO6: -158.178,76.342 -152.59,76.342 -150.812,74.564 -150.812,72.532 -152.463,72.532 -154.241,74.31 -158.178,74.31
  region net NO2: -158.305,46.497 -151.955,46.497 -150.812,45.354 -150.812,43.068 -152.971,43.068 -154.368,44.465 -158.305,44.465
  region net NO1: -158.178,61.61 -152.209,61.61 -150.812,60.213 -150.812,58.054 -152.717,58.054 -154.241,59.578 -158.178,59.578
  region net NO5: -158.305,90.566 -152.59,90.566 -150.939,88.915 -150.939,86.756 -152.59,86.756 -154.368,88.534 -158.305,88.534
  region net M4: -158.305,21.605 -158.305,19.573 -148.78,19.573 -148.272,20.081 -148.272,23.256 -150.177,23.256 -151.828,21.605
  region net M3: -158.432,36.464 -158.432,34.432 -148.907,34.432 -148.272,35.067 -148.272,38.115 -150.177,38.115 -151.828,36.464
  region net M2: -158.432,51.577 -158.432,49.545 -148.907,49.545 -148.272,50.18 -148.272,53.355 -150.05,53.355 -151.828,51.577
  region net M1: -158.432,66.69 -158.432,64.658 -148.907,64.658 -148.272,65.293 -148.272,68.214 -149.923,68.214 -151.447,66.69
  region net M6: -158.305,81.422 -158.305,79.39 -148.78,79.39 -148.272,79.898 -148.272,82.692 -150.05,82.692 -151.32,81.422
  region net M5: -158.559,95.646 -158.559,93.614 -149.669,93.614 -148.399,94.884 -148.399,96.916 -150.304,96.916 -151.574,95.646
Bottom Layer:
  rectangle net 3.3v-ADE: -30.003,23.044 -28.499,26.234
  rectangle net 3.3v-ADE: -65.703,16.144 -63.103,30.434
  rectangle net 5-volt: -119.303,123.484 -116.503,125.684
  region net 5-volt: -97.853,93.388 -97.853,91.356 -92.392,91.356 -92.392,93.388
  rectangle net 5-volt: -94.202,-15.066 -93.294,-11.765
  rectangle net VREF-: -31.924,24.653 -30.527,26.334
  rectangle net VREF-: -142.589,3.348 -141.573,4.999
  rectangle net Pulse2: -33.083,98.821 -30.924,100.345
  rectangle net PH2: 42.244,41.798 50.864,50.831
  rectangle net SDA-FREE: -130.111,120.538 -128.714,124.348
  rectangle net SCL-FREE: -127.571,120.538 -126.301,124.221
  rectangle net NetCT2_3: 42.244,-36.45 50.864,-26.401
  rectangle net PH1: 42.244,-20.813 50.991,-11.399
  rectangle net NetCT1_3: 42.244,24.796 50.991,34.559
  rectangle net NetD17_2: -111.823,116.474 -110.299,119.268
  rectangle net NetD18_2: -109.283,116.474 -107.759,119.268
  rectangle net RX1-MCU: -111.823,120.538 -110.299,123.84
  rectangle net TX1-MCU: -109.156,120.665 -107.886,124.475
  rectangle net NetD20_2: -87.439,84.978 -85.915,87.518
  rectangle net NetD19_2: -84.01,84.724 -82.486,87.518
  rectangle net Pulse1: -45.021,98.821 -42.608,100.345
  region net 5-volt: -115.633,100.091 -118.777,96.947 -119.348,96.947 -119.348,99.932 -119.189,100.091
  region net NULL2: 51.005,79.088 ccw(c49.354,79.088) 49.354,80.739 44.02,80.739 ccw(c44.02,79.088) 42.369,79.088 42.369,74.04 cw(c40.702,74.04) 40.702,72.373 33.336,72.373 ccw(c33.336,69.833) 30.796,69.833 30.796,69.071 ccw(c32.574,69.071) 32.574,67.293 48.465,67.293 ccw(c48.465,69.833) 51.005,69.833
  region net NULL1: 51.005,17.271 ccw(c49.354,17.271) 49.354,18.922 44.02,18.922 ccw(c44.02,17.271) 42.369,17.271 42.369,12.223 cw(c40.702,12.223) 40.702,10.556 33.336,10.556 ccw(c33.336,8.016) 30.796,8.016 30.796,7.254 ccw(c32.574,7.254) 32.574,5.476 48.465,5.476 ccw(c48.465,8.016) 51.005,8.016
  region net NULL2: 33.336,79.401 37.999,79.401 38.297,79.103 38.297,73.201 39.697,71.801 39.597,71.701 33.436,71.701
  region net NULL1: 33.497,17.584 37.999,17.584 38.297,17.286 38.297,11.384 39.697,9.984 39.597,9.884 33.597,9.884
  region net OUT3-Relay: -137.604,33.543 -137.604,35.829 -136.715,35.829 -136.461,36.083 -136.588,36.21 -136.588,37.861 -138.493,37.861 -139.128,37.226 -139.128,33.543
  pour cut-out: -39.403,-10.361 -35.203,-10.361 -35.203,-10.891 -39.623,-10.891
  region net NO4: -158.051,16.525 -151.701,16.525 -150.812,15.636 -150.812,13.096 -152.717,13.096 -154.114,14.493 -158.051,14.493
  region net NO3: -158.051,31.384 -151.701,31.384 -150.812,30.495 -150.812,27.955 -152.717,27.955 -154.114,29.352 -158.051,29.352
  region net NO6: -158.178,76.342 -152.59,76.342 -150.812,74.564 -150.812,72.532 -152.463,72.532 -154.241,74.31 -158.178,74.31
  region net NO2: -158.305,46.497 -151.955,46.497 -150.812,45.354 -150.812,43.068 -152.971,43.068 -154.368,44.465 -158.305,44.465
  region net NO1: -158.178,61.61 -152.209,61.61 -150.812,60.213 -150.812,58.054 -152.717,58.054 -154.241,59.578 -158.178,59.578
  region net NO5: -158.305,90.566 -152.59,90.566 -150.939,88.915 -150.939,86.756 -152.59,86.756 -154.368,88.534 -158.305,88.534
  region net M4: -158.305,21.605 -158.305,19.573 -148.78,19.573 -148.272,20.081 -148.272,23.256 -150.177,23.256 -151.828,21.605
  region net M3: -158.432,36.464 -158.432,34.432 -148.907,34.432 -148.272,35.067 -148.272,38.115 -150.177,38.115 -151.828,36.464
  region net M2: -158.432,51.577 -158.432,49.545 -148.907,49.545 -148.272,50.18 -148.272,53.355 -150.05,53.355 -151.828,51.577
  region net M1: -158.432,66.69 -158.432,64.658 -148.907,64.658 -148.272,65.293 -148.272,68.214 -149.923,68.214 -151.447,66.69
  region net M6: -158.305,81.422 -158.305,79.39 -148.78,79.39 -148.272,79.898 -148.272,82.692 -150.05,82.692 -151.32,81.422
  region net M5: -158.559,95.646 -158.559,93.614 -149.669,93.614 -148.399,94.884 -148.399,96.916 -150.304,96.916 -151.574,95.646
  region net OUT5-Relay: -138.62,92.471 -138.62,94.376 -138.239,94.757 -136.715,94.757 -136.715,96.535 -139.128,96.535 -140.144,95.519 -140.144,92.471
  region net GND-out: -136.588,89.042 -138.366,89.042 -138.62,89.296 -138.62,91.328 -140.271,91.328 -140.271,87.772 -139.636,87.137 -136.588,87.137
  region net GND-out: -138.239,76.85 -138.239,75.072 -137.858,74.691 -136.588,74.691 -136.588,72.659 -139.001,72.659 -139.763,73.421 -139.763,76.85
  region net OUT6-Relay: -139.763,77.993 -139.763,81.549 -139.128,82.184 -136.588,82.184 -136.588,80.406 -136.686,80.308 -137.829,80.308 -138.239,79.898 -138.239,77.993
  region net OUT4-Relay: -137.985,18.811 -137.985,20.538 -137.553,20.97 -136.334,20.97 -136.334,22.875 -138.493,22.875 -139.509,21.859 -139.509,18.811
  region net GND-out: -137.604,32.4 -137.604,30.368 -137.35,30.114 -136.588,30.114 -136.588,28.209 -138.62,28.209 -139.128,28.717 -139.128,32.4
  region net GND-out: -139.001,47.767 -139.001,44.084 -138.493,43.576 -136.588,43.576 -136.588,44.846 -137.477,45.735 -137.477,47.767
  region net OUT2-Relay: -139.001,48.783 -139.001,51.831 -137.731,53.101 -136.588,53.101 -136.588,52.085 -137.477,51.196 -137.477,48.783
  region net GND-out: -139.001,62.626 -139.001,59.197 -138.112,58.308 -136.588,58.308 -136.588,60.34 -137.096,60.34 -137.477,60.721 -137.477,62.626
  region net OUT1-Relay: -139.001,63.642 -139.001,66.944 -137.985,67.96 -135.318,67.96 -135.318,66.182 -135.572,65.928 -137.223,65.928 -137.477,65.674 -137.477,63.642

## Silkscreen, mask and mechanical layers (free items; w line width, h text height)
Top Overlay:
  circle w0.254: c22.416,98.821 r3.297
  circle w0.254: c-21.653,-1.001 r3.297
  circle w0.254: c-103.822,12.715 r3.297
  circle w0.254: c-91.63,62.118 r3.297
  circle w0.254: c-125.031,109.87 r3.297
  region: -109.283,-1.126 -108.233,-2.176 -107.183,-1.126
  region: -134.329,15.797 -133.279,14.747 -132.229,15.797
  region: -134.611,31.545 -133.561,30.495 -132.511,31.545
  region: -134.738,47.039 -133.688,45.989 -132.638,47.039
  region: -134.738,75.36 -133.688,74.31 -132.638,75.36
  region: -134.865,61.009 -133.815,59.959 -132.765,61.009
  region: -134.684,90.218 -133.634,89.168 -132.584,90.218
  region: -82.198,81.988 -83.248,83.038 -84.298,81.988
  region: -85.627,81.988 -86.677,83.038 -87.727,81.988
  region: -67.245,113.34 -68.295,114.39 -69.345,113.34
  region: -109.993,113.8 -111.043,114.85 -112.093,113.8
  region: -107.471,113.792 -108.521,114.842 -109.571,113.792
  region: -89.553,29.384 -88.503,28.334 -87.453,29.384
  region: -84.153,29.384 -83.103,28.334 -82.053,29.384
  region: -86.853,29.384 -85.803,28.334 -84.753,29.384
  lines w0.2: -125.539,-23.48 -42.59,-23.368 ; -44.804,41.25 -40.068,41.25 ; -44.767,38.71 -40.068,38.71 ; -44.767,43.79 -40.068,43.79 ; -29.781,-23.353 2.223,-23.48 ; -44.804,36.17 -40.068,36.17 -40.068,46.203 -44.804,46.203 -44.804,36.17
  lines w0.254: -134.865,59.959 -132.765,59.959 ; -134.738,45.989 -132.638,45.989 ; -134.738,74.31 -132.638,74.31 ; -134.684,89.168 -132.584,89.168 ; -134.611,30.495 -132.511,30.495 ; -134.329,14.747 -132.229,14.747 ; -112.093,114.85 -109.993,114.85 ; -109.571,114.842 -107.471,114.842 ; -109.283,-2.176 -107.183,-2.176 ; -89.553,28.334 -87.453,28.334 ; -87.727,83.038 -85.627,83.038 ; -86.853,28.334 -84.753,28.334 ; -84.298,83.038 -82.198,83.038 ; -84.153,28.334 -82.053,28.334 ; -69.345,114.39 -67.245,114.39 ; -134.865,61.009 -132.765,61.009 -133.815,59.959 -134.865,61.009 ; -134.738,47.039 -133.688,45.989 -132.638,47.039 -134.738,47.039 ; -134.738,75.36 -132.638,75.36 -133.688,74.31 -134.738,75.36 ; -134.684,90.218 -132.584,90.218 -133.634,89.168 -134.684,90.218 ; -134.611,31.545 -133.561,30.495 -132.511,31.545 -134.611,31.545 ; -134.329,15.797 -133.279,14.747 -132.229,15.797 -134.329,15.797 ; -112.093,113.8 -109.993,113.8 -111.043,114.85 -112.093,113.8 ; -109.571,113.792 -107.471,113.792 -108.521,114.842 -109.571,113.792 ; -109.283,-1.126 -108.233,-2.176 -107.183,-1.126 -109.283,-1.126 ; -89.553,29.384 -87.453,29.384 -88.503,28.334 -89.553,29.384 ; -87.727,81.988 -86.677,83.038 -85.627,81.988 -87.727,81.988 ; -86.853,29.384 -85.803,28.334 -84.753,29.384 -86.853,29.384 ; -84.298,81.988 -83.248,83.038 -82.198,81.988 -84.298,81.988 ; -84.153,29.384 -83.103,28.334 -82.053,29.384 -84.153,29.384 ; -69.345,113.34 -67.245,113.34 -68.295,114.39 -69.345,113.34
  text "CS" at -68.904,125.357 h0.8
  text "I2C" at -134.386,122.994 h1.5
  text "+" at -153.853,121.801 h0.8 r90
  text "G" at -124.323,121.254 h0.8 r90
  text "G" at -122.123,121.254 h0.8 r90
  text "SPI3" at -57.002,120.962 h1.5 r90
  text "5v" at -118.023,120.954 h0.8 r90
  text "5v" at -115.523,120.954 h0.8 r90
  text "SCL" at -126.421,120.15 h0.8 r90
  text "SDA" at -129.088,120.023 h0.8 r90
  text "RX" at -110.673,120.023 h0.8 r90
  text "TX" at -108.133,120.023 h0.8 r90
  text "GND" at -113.34,119.515 h0.8 r90
  text "SCK" at -60.127,119.515 h0.8 r90
  text "MISO" at -62.667,119.261 h0.8 r90
  text "MOSI" at -65.207,119.134 h0.8 r90
  text "-" at -153.853,117.713 h0.8 r180
  text "SSR1" at -152.237,117.517 h1.5 r90
  text "USART1" at -105.262,116.898 h1.5 r90
  text "Temp1" at 35.995,112.397 h1.3 r180
  text "Pulse1" at -48.803,112.234 h1.3
  text "Pulse2" at -36.947,111.975 h1.3
  text "COM1" at -102.81,111.517 h1.5
  text "+" at -153.98,111.006 h0.8 r90
  text "-" at -153.98,106.918 h0.8 r180
  text "SSR2" at -152.237,106.722 h1.5 r90
  text "Main LAB Board - Duration" at -104.108,99.366 h3.81
  text "Relay1" at -142.255,97.92 h1.5
  text "Temp2" at 38.737,95.831 h1.3 r90
  text "Relay2" at -142.434,83.315 h1.5
  text "Phase 1" at 36.252,74.017 h0.8
  text "Relay3" at -142.434,68.964 h1.5
  text "Phase 2" at 37.617,64.428 h0.8
  text "Relay4" at -142.505,54.105 h1.5
  text "PROG" at -45.055,46.844 h1.5
  text "GND" at -43.504,44.585 h0.8
  text "CLK" at -43.422,42.045 h0.8
  text "DIO" at -43.262,39.632 h0.8
  text "Relay5" at -142.434,38.865 h1.5
  text "Neutral 2" at 40.697,37.346 h0.8
  text "VCC" at -43.397,36.965 h0.8
  text "Relay6" at -142.434,24.006 h1.5
  text "Phase 1" at 36.252,12.2 h0.8
  text "RESET KEY" at -86.783,10.054 h0.8
  text "Input Power" at -166.773,-14.942 h1.3
  text "ADCs" at -17.003,-22.866 h1.3
  text "4-20 mA Sensors" at -85.903,-22.966 h1.3
  text "Neutral 1" at 40.867,-23.078 h0.8
  text "+12 Volt" at -153.774,-26.997 h1.3
  text "Earth" at -152.431,-29.41 h1.3
  text "GND" at -151.62,-32.331 h1.3

## Text inside footprints (layer, text, board x,y; h text height)
C8: Top Overlay "+" at -149.253,-18.072 h0.8 r180
LCD1: Top Overlay "14" at 11.176,117.729 h1.27; Top Overlay "1" at -21.336,117.983 h1.27; Top Overlay "16" at 16.256,117.983 h1.27; Top Overlay "LCD 16X2-A" at -22.31,90.254 h1.91
P6: Top Overlay "1" at -96.142,114.899 h0.8; Top Overlay "5" at -80.013,114.899 h0.8; Top Overlay "9" at -84.148,120.139 h0.8; Top Overlay "6" at -92.448,120.139 h0.8
P10: Top Overlay "CW" at -42.641,-3.911 h1
T1: Top Overlay "2" at -130.078,-32.18 h0.8; Top Overlay "1" at -134.904,-32.18 h0.8
T2: Top Overlay "2" at -118.067,-32.18 h0.8; Top Overlay "1" at -122.893,-32.18 h0.8
T3: Top Overlay "2" at -106.057,-32.18 h0.8; Top Overlay "1" at -110.883,-32.18 h0.8
T4: Top Overlay "2" at -94.046,-32.18 h0.8; Top Overlay "1" at -98.872,-32.18 h0.8
T5: Top Overlay "2" at -82.036,-32.18 h0.8; Top Overlay "1" at -86.862,-32.18 h0.8
T6: Top Overlay "2" at -70.025,-32.18 h0.8; Top Overlay "1" at -74.851,-32.18 h0.8
T7: Top Overlay "2" at -58.015,-32.18 h0.8; Top Overlay "1" at -62.841,-32.18 h0.8
T8: Top Overlay "2" at -46.004,-32.18 h0.8; Top Overlay "1" at -50.83,-32.18 h0.8
T9: Top Overlay "3" at -17.367,-32.179 h0.8; Top Overlay "2" at -22.447,-32.179 h0.8; Top Overlay "1" at -27.273,-32.179 h0.8
T10: Top Overlay "3" at -0.666,-32.179 h0.8; Top Overlay "2" at -5.746,-32.179 h0.8; Top Overlay "1" at -10.572,-32.179 h0.8
T12: Top Overlay "2" at -50.323,120.728 h0.8 r180; Top Overlay "1" at -45.497,120.728 h0.8 r180
T13: Top Overlay "1" at -33.813,120.728 h0.8 r180; Top Overlay "2" at -38.639,120.728 h0.8 r180
T14: Top Overlay "3" at 32.29,120.713 h0.8 r180; Top Overlay "2" at 37.37,120.713 h0.8 r180; Top Overlay "1" at 42.196,120.713 h0.8 r180
T16: Top Overlay "3" at 46.799,107.41 h0.8 r90; Top Overlay "2" at 46.799,102.33 h0.8 r90; Top Overlay "1" at 46.799,97.504 h0.8 r90
T18: Top Overlay "2" at 21.781,79.661 h0.8 r270; Top Overlay "1" at 21.781,84.487 h0.8 r270
T19: Top Overlay "1" at -162.21,-18.718 h0.8 r270; Top Overlay "2" at -162.21,-23.544 h0.8 r270; Top Overlay "3" at -162.21,-28.624 h0.8 r270
T20: Top Overlay "1" at -38.819,-32.18 h0.8; Top Overlay "2" at -33.993,-32.18 h0.8
T23: Top Overlay "2" at -161.67,117.649 h0.8 r270; Top Overlay "1" at -161.67,122.475 h0.8 r270
T24: Top Overlay "2" at -161.67,106.727 h0.8 r270; Top Overlay "1" at -161.67,111.553 h0.8 r270
U6: Top Overlay "*" at -28.725,14.792 h1.27 r90; Mechanical 13 "*" at -28.725,16.375 h1.27 r90
X1: Top Overlay "2" at -161.924,60.88 h0.8 r270; Top Overlay "1" at -161.924,65.706 h0.8 r270
X2: Top Overlay "2" at -161.924,45.767 h0.8 r270; Top Overlay "1" at -161.924,50.593 h0.8 r270
X3: Top Overlay "2" at -161.924,30.654 h0.8 r270; Top Overlay "1" at -161.924,35.48 h0.8 r270
X4: Top Overlay "2" at -161.924,15.795 h0.8 r270; Top Overlay "1" at -161.924,20.621 h0.8 r270
X5: Top Overlay "2" at -161.924,75.612 h0.8 r270; Top Overlay "1" at -161.924,80.438 h0.8 r270
X6: Top Overlay "2" at -161.924,89.836 h0.8 r270; Top Overlay "1" at -161.924,94.662 h0.8 r270